# Altium PCB Bee Hive MasterBoard PCB_v2.PcbDoc
Units mm, origin at the board's own origin, x right, y up, seen from the top; angles counter-clockwise.
Board outline 90 x 88 mm, 2 copper layers (Top Layer, Bottom Layer), stack 1.671 mm thick; 33 components, 32 nets, 145 pads, 48 vias.
Unrouted connection lines stored in the file: 173.
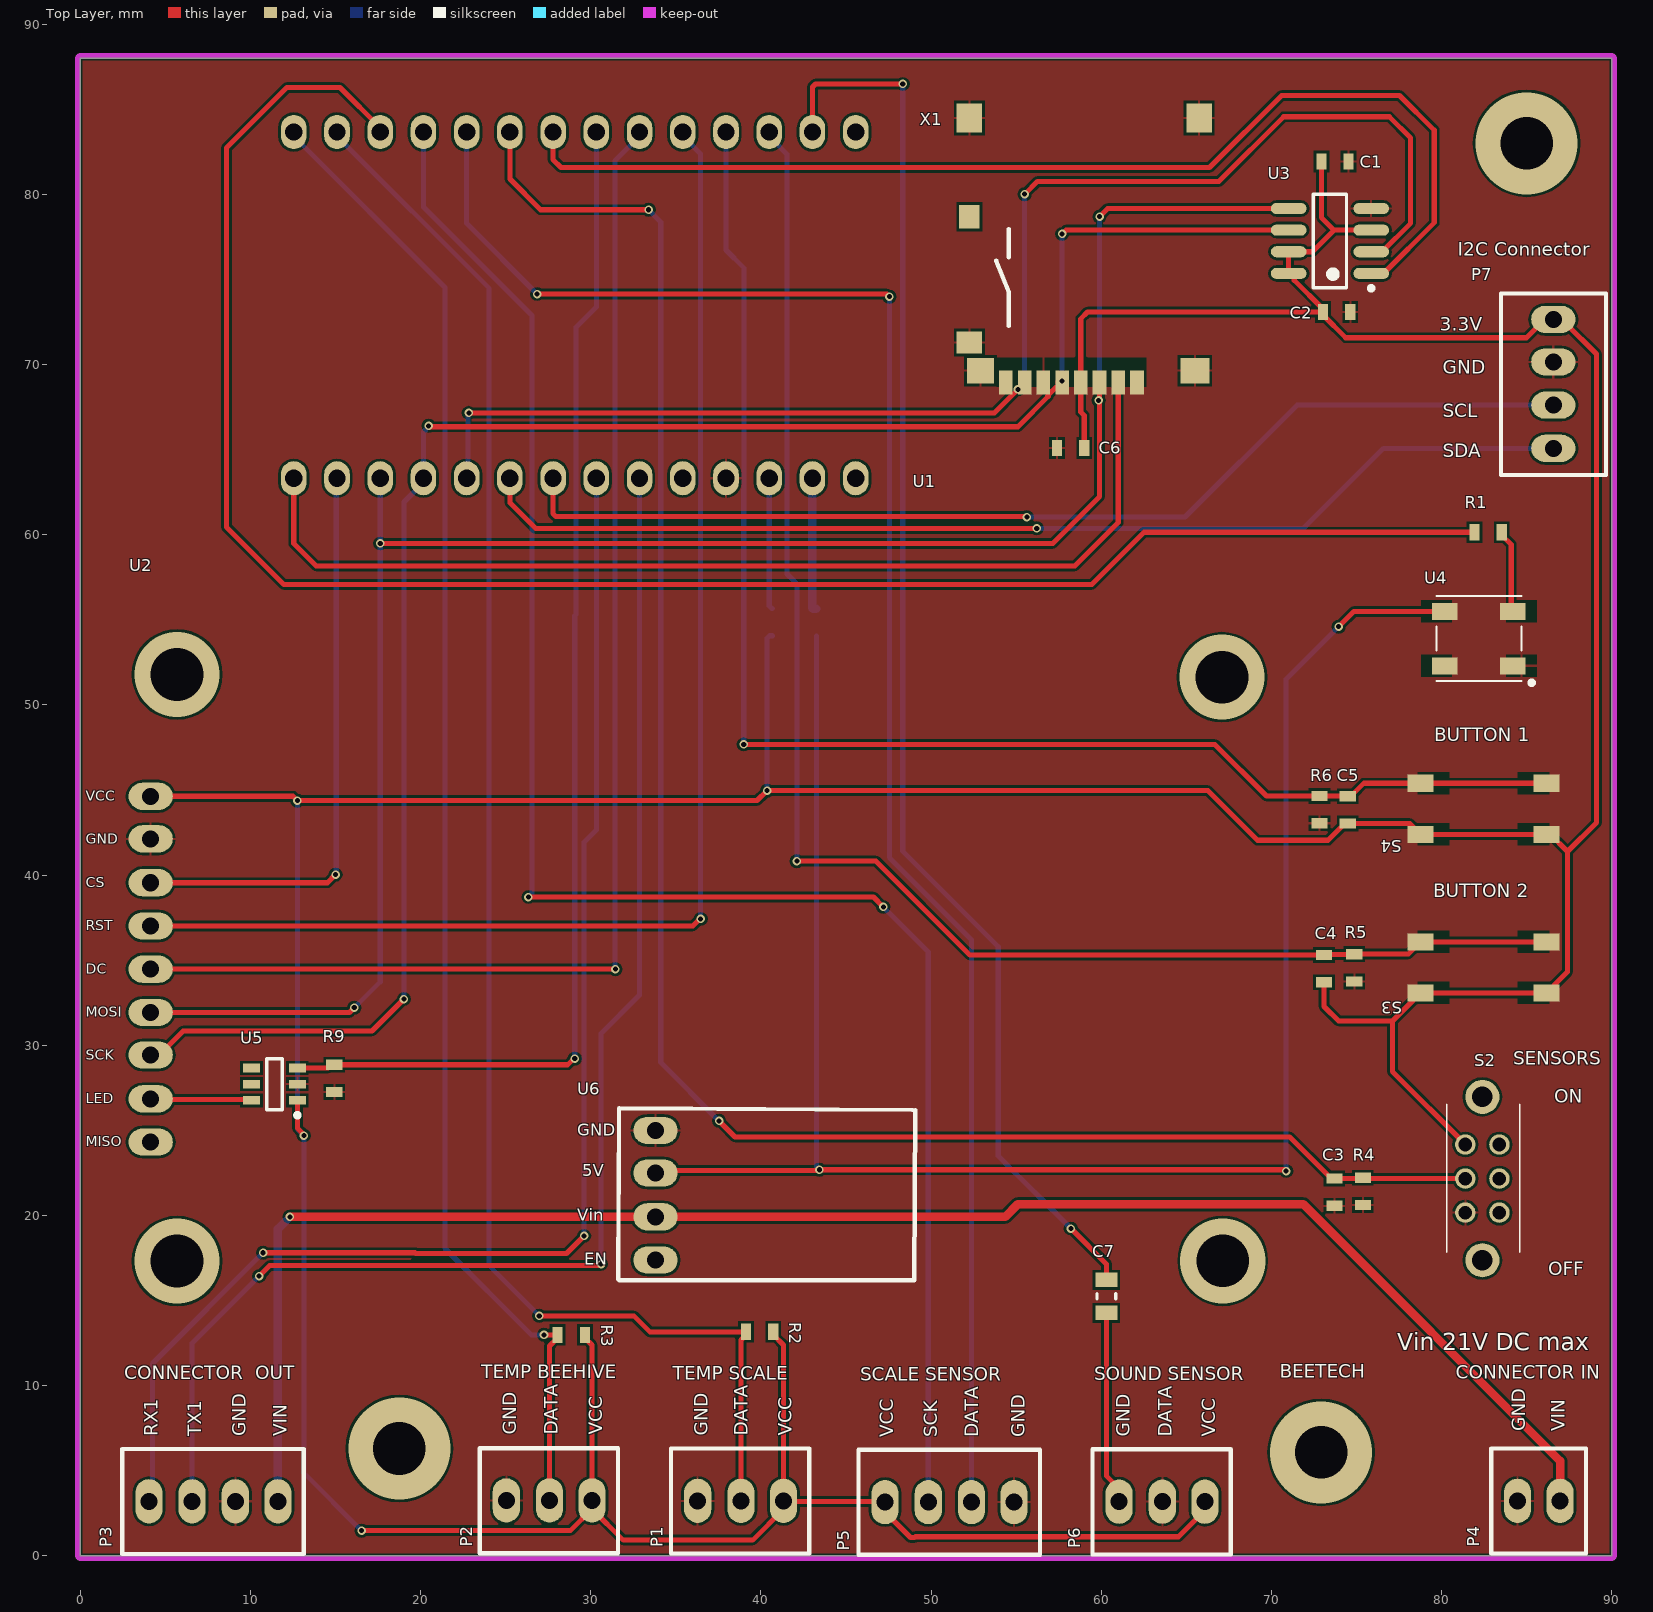
[diagram p0: Top Layer view]
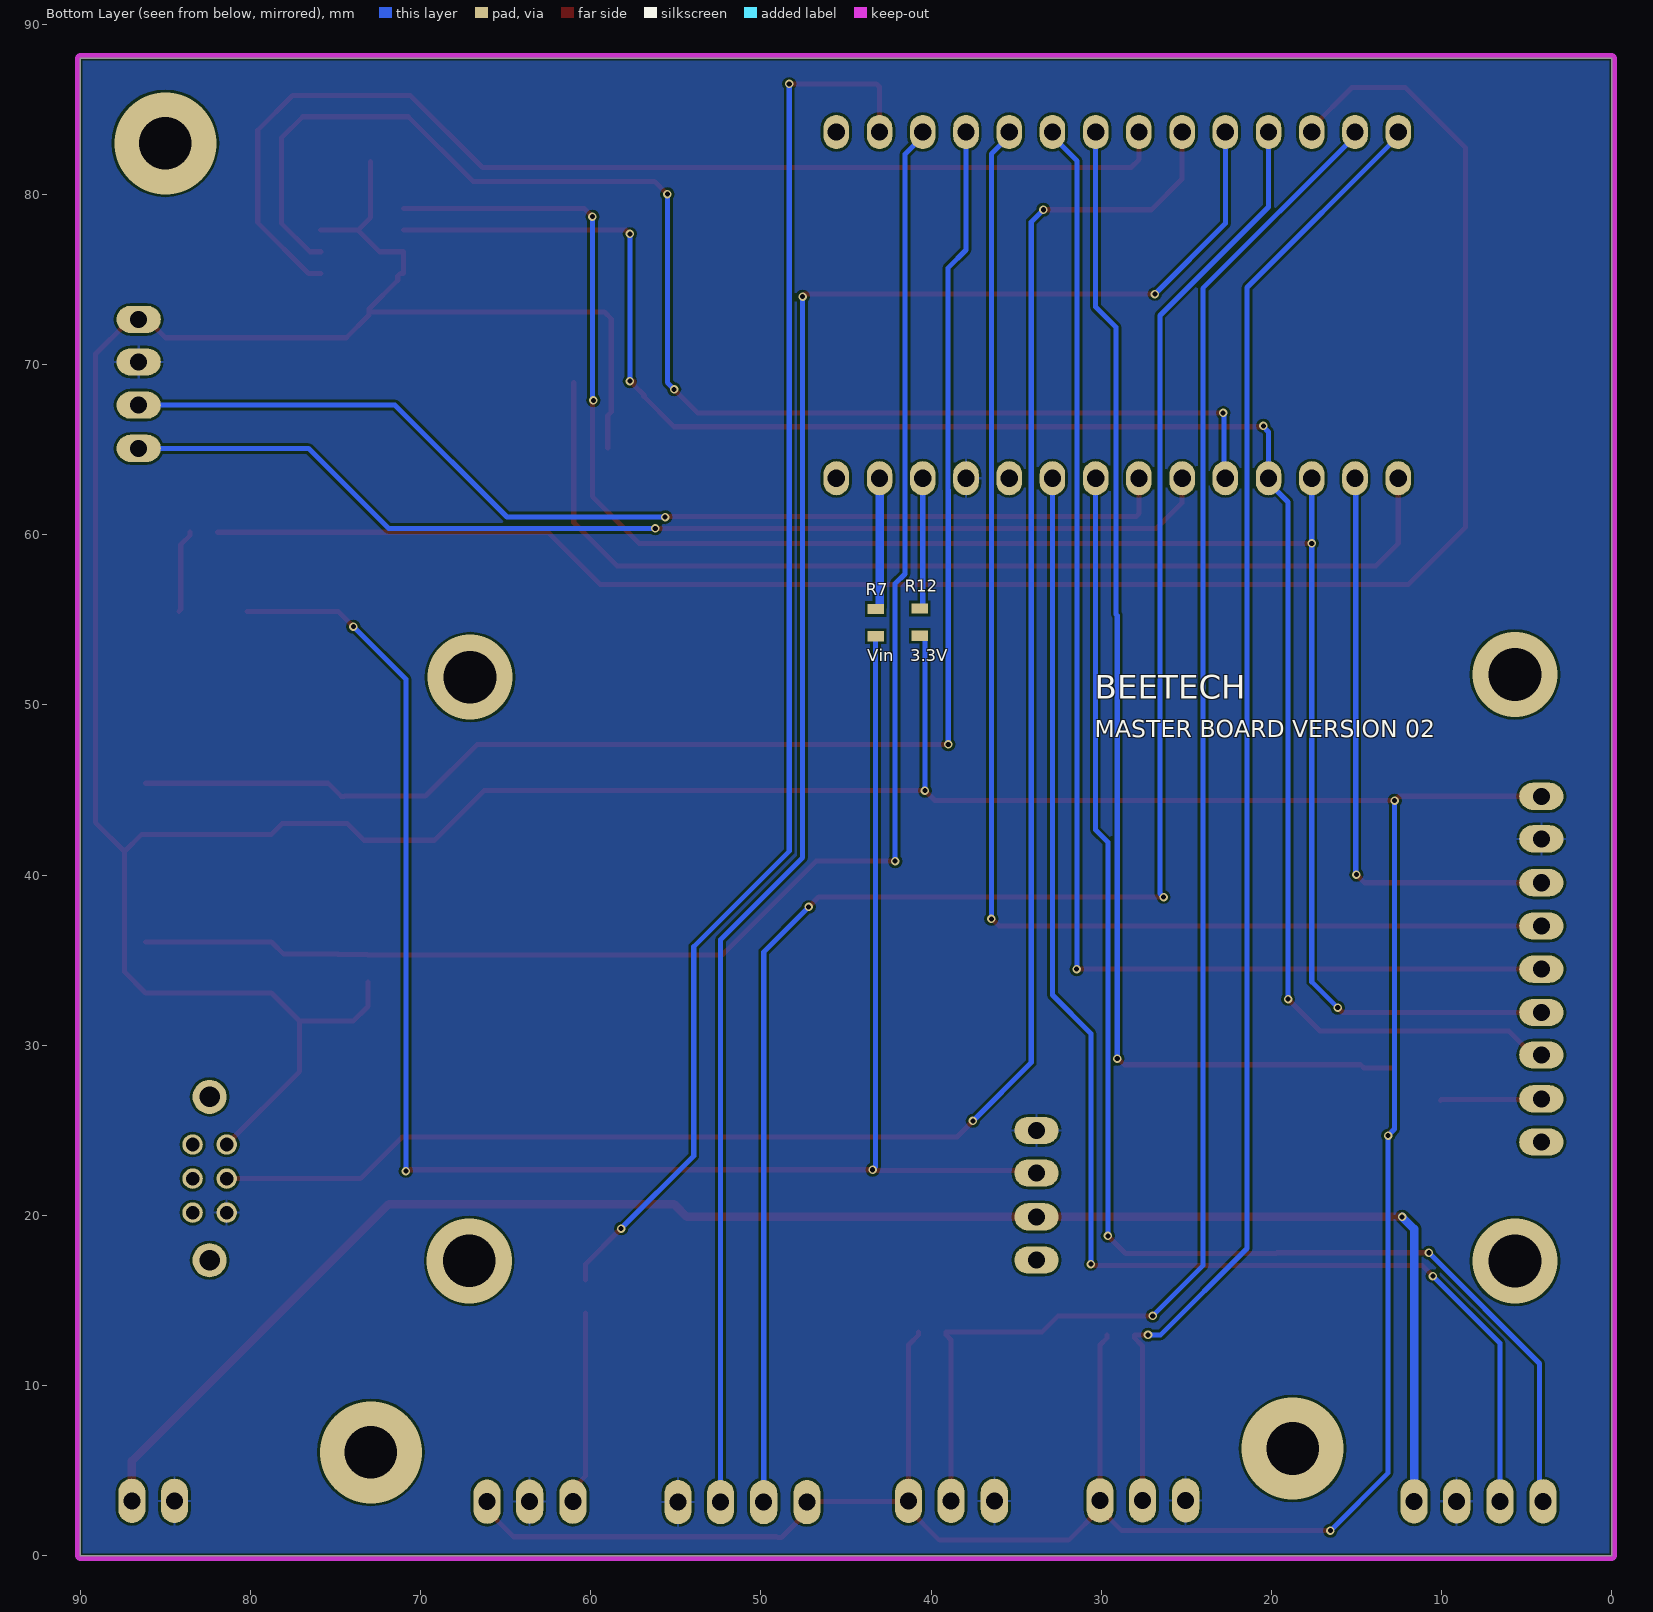
[diagram p1: Bottom Layer view, seen from below]

## Layer stack, top to bottom
Top Solder: solder mask 0.0102, Solder Resist, Dk 3.5
Top Layer: signal copper 0.0356
Dielectric1: core 1.6, FR-4, Dk 4.8
Bottom Layer: signal copper 0.0356
Bottom Solder: solder mask 0.0102, Solder Resist, Dk 3.5

## Board outline
0,0 90,0 90,88 0,88

## Design rules (kind name [scope] priority, off if disabled: settings)
Clearance Clearance_1 [InNamedPolygon('SW_L01_P024')] p1: gap=0.254 ignorepadtopadclearanceinfootprint=FALSE except(0: Arc-Hole Track-Hole SMDPad-Hole THPad-Hole Via-Hole Fill-Hole Poly-Hole Region-Hole Text-Hole)
Clearance [All] p2: gap=0.15 ignorepadtopadclearanceinfootprint=FALSE
ComponentClearance [All] p1: gap=0.001 collisioncheckmode=3 verticalgap=0.254 showdistances=FALSE
FabricationTestPointUsage [All] p1 off: valid=0 allowmultiple=FALSE
FabricationTestpoint [All] p1 off: side=3 testpointundercomponent=TRUE minsize=1.016 maxsize=2.54 preferedsize=1.524 minholesize=0 maxholesize=1.016 preferedholesize=0.813 testpointgrid=0.025 allowsidetop=TRUE allowsidebottom=TRUE usegrid=TRUE gridtolerance=0
HoleSize [All] p1: absolutevalues=TRUE maxlimit=6 minlimit=0.025 maxpercent=80.000 minpercent=20.000
HoleToHoleClearance [All] p1: gap=0 allowstackedmicrovias=TRUE
MinimumSolderMaskSliver [All] p1: minsoldermaskwidth=0
PolygonConnect PolygonConnect_14 [All vs IsNamedPolygon('GND_L01_P041')] p1: connectstyle=Relief reliefconductorwidth=0.15 reliefentries=4 polygonreliefangle="90 Angle" airgapwidth=0.15
PolygonConnect V_BAT_L01_P036 [All vs IsNamedPolygon('V_BAT_L01_P036')] p2: connectstyle=Direct reliefconductorwidth=0.254 reliefentries=4 polygonreliefangle="90 Angle" airgapwidth=0.254
PolygonConnect V_BAT2 [All vs IsNamedPolygon('V_BAT2_L01_P004')] p3: connectstyle=Direct reliefconductorwidth=0.254 reliefentries=4 polygonreliefangle="90 Angle" airgapwidth=0.254
PolygonConnect V_BAT [All vs IsNamedPolygon('V_BAT_L01_P010')] p4: connectstyle=Direct reliefconductorwidth=0.254 reliefentries=4 polygonreliefangle="90 Angle" airgapwidth=0.254
PolygonConnect V_SYS2 [All vs IsNamedPolygon('V_SYS2_L01_P012')] p5: connectstyle=Direct reliefconductorwidth=0.254 reliefentries=4 polygonreliefangle="90 Angle" airgapwidth=0.254
PolygonConnect +3.3b_uBlox [All vs IsNamedPolygon('+3.3V_UBLOX_L01_P014')] p6: connectstyle=Direct reliefconductorwidth=0.254 reliefentries=4 polygonreliefangle="90 Angle" airgapwidth=0.254
PolygonConnect V_LIPO_SYS_L01_P016 [All vs IsNamedPolygon('V_LIPO_SYS_L01_P016')] p7: connectstyle=Direct reliefconductorwidth=0.254 reliefentries=4 polygonreliefangle="90 Angle" airgapwidth=0.254
PolygonConnect V_LIPO_SYS_L01_P020 [All vs IsNamedPolygon('V_LIPO_SYS_L02_P020')] p8: connectstyle=Direct reliefconductorwidth=0.254 reliefentries=4 polygonreliefangle="90 Angle" airgapwidth=0.254
PolygonConnect V_SYS_L02_P024 [All vs IsNamedPolygon('V_SYS_L02_P024')] p9: connectstyle=Direct reliefconductorwidth=0.254 reliefentries=4 polygonreliefangle="90 Angle" airgapwidth=0.254
PolygonConnect VCC_USB_5.0V_L01_P026 [All vs IsNamedPolygon('VCC_USB_5.0V_L01_P026')] p10: connectstyle=Direct reliefconductorwidth=0.254 reliefentries=4 polygonreliefangle="90 Angle" airgapwidth=0.254
PolygonConnect SW [All vs IsNamedPolygon('SW_L01_P008')] p11: connectstyle=Direct reliefconductorwidth=0.254 reliefentries=4 polygonreliefangle="90 Angle" airgapwidth=0.254
PolygonConnect [All] p12: connectstyle=Relief reliefconductorwidth=0.15 reliefentries=4 polygonreliefangle="90 Angle" airgapwidth=0.15
RoutingVias [All] p1: holewidth=0.3 width=0.5 viastyle="Through Hole" minholewidth=0.2 minwidth=0.3 maxholewidth=1.2 maxwidth=2 useviatemplates=TRUE viatemplateguid#1={68F519FB-439D-452A-8ACF-2DE296BA9197} viatemplateguid#2={5ED9683F-E5DF-4E78-BDB1-49E541A8EC46} viatemplateguid#3={FAFF2F81-81C9-46E2-9D3D-D8AEF9417303} viatemplateguid#4={175E6F9D-763D-42D4-A59E-C21ACC7DA2E1} viatemplatename#1=v50h30m0mx0 viatemplatename#2=v50h30m50mx0 viatemplatename#3=v50h20 viatemplatename#4=v50h20mx0
SilkToSilkClearance [All] p1: silktosilkclearance=0.152
SilkToSolderMaskClearance [IsPad] p1: minsilkscreentomaskgap=0.127 clearancetoexposedcopper=TRUE
SolderMaskExpansion [All] p1: expansion=0.102 istentingtop=FALSE
Width [All] p1: maxlimit=5.08 minlimit=0.01 preferedwidth=0.305 minimp=50.000000 maximp=50.000000 favimp=50.000000
22 further rules are at their usual default settings.

## Components (designator, comment, footprint, x,y, rotation, side; value= is the part's Value field where it differs from the comment)
C1 "100nF 0603_1" "CAP 0603" 73.735,81.926 r180 top value=100nF
C2 "100nF 0603_1" "CAP 0603" 73.836,73.087 r180 top value=100nF
C3 "100nF 0603" "CAP 0603" 73.698,21.363 r270 top value=100nF
C4 "100nF 0603" "CAP 0603" 73.094,34.502 r90 top value=100nF
C5 "100nF 0603" "CAP 0603" 74.489,43.827 r90 top value=100nF
C6 "10uF 0603" "CAP 0603" 58.202,65.1 r0 top value=10uF
C7 "100nF 0805" "CAP 0805" 60.3,15.24 r90 top value=1uF
P1 "3-Pin Right Angle Housing" "3PIN - RND 205-EK254-2.54-03P" 41.325,3.225 r270 top
P2 "3-Pin Right Angle Housing" "3PIN - RND 205-EK254-2.54-03P" 30.078,3.25 r270 top
P3 "4-Pin Right Angle Housing" "4PIN - RND 205-EK254-2.54-04P" 11.615,3.2 r270 top
P4 "2-Pin Right Angle Housing" "2PIN - RND 205-EK254-2.54-02P" 86.965,3.225 r270 top
P5 "4-Pin Right Angle Housing" "4PIN - RND 205-EK254-2.54-04P" 54.875,3.15 r270 top
P6 "3-Pin Right Angle Housing" "3PIN - RND 205-EK254-2.54-03P" 66.09,3.175 r270 top
P7 "4-Pin Right Angle Housing" "4PIN - RND 205-EK254-2.54-04P" 86.563,72.655 r0 top
R1 "470 Ohm 0603" "RES 0603 FOOTPRINT" 82.741,60.147 r0 top value=470
R2 "4.7k Ohm 0603" "RES 0603 FOOTPRINT" 39.929,13.157 r180 top value=4.7k
R3 "4.7k Ohm 0603" "RES 0603 FOOTPRINT" 28.854,12.979 r180 top value=4.7k
R4 "10k Ohm 0603" "RES 0603 FOOTPRINT" 75.373,21.416 r90 top value=10k
R5 "10k Ohm 0603" "RES 0603 FOOTPRINT" 74.869,34.552 r90 top value=10k
R6 "10k Ohm 0603" "RES 0603 FOOTPRINT" 72.829,43.846 r90 top value=10k
R7 "0 Ohm 0603" "RES 0603 FOOTPRINT" 43.256,54.839 r270 bottom value=0
R9 "47k Ohm 0603" "RES 0603 FOOTPRINT" 14.93,28.052 r90 top value=47k
R12 "0 Ohm 0603" "RES 0603 FOOTPRINT" 40.665,54.864 r270 bottom value=0
S2 "Schiebeschalter EG2207" "Schiebeschalter on-on 2 P, EG2207" 82.398,22.163 r90 top
S3 "Taster Print_SMD_3" "Taster Print - SMD - PTS647SM70SMTR2LFS" 82.463,34.572 r180 top
S4 "Taster Print_SMD_3" "Taster Print - SMD - PTS647SM70SMTR2LFS" 82.463,43.894 r180 top
U1 "Arduino MKR GSM 1400" "Arduino GSM MKR 1400 v2" 49.378,73.508 r180 top locked
U2 "TFT 2.2 SPI 240x320" "TFT 2.2 SPI 240x320" 4.14,44.628 r0 top locked
U3 "FRAM MB85RS64VPNF-G-JNERE1" "SO 8Pin" 73.44,77.263 r180 top
U4 "neoPixel" "neoPixel 5050 adafruit 1655" 82.194,53.899 r0 top
U5 "TPS22917DBVT" "SOT23 - 6" 11.412,27.711 r180 top
U6 "MPM3610 5V" "MPM3610 Buck Converter" 33.807,24.994 r0 top
X1 "SD micro Card Holder_2" "SD Card Holder - micro - 2 - sd Card inserted" 52.998,85.339 r0 top

## Footprints (in the part's own frame and the unit in brackets; to place one, negate y for a bottom-side part, rotate by r counter-clockwise, add the part's x,y. Pads: shape width x height; smd on the part's side, far side on the other; paste and mask are expansions set on the pad)
"2PIN - RND 205-EK254-2.54-02P" [mm] "RND 205-EK254-2.54-02P"
  oval 2.6x1.6 hole 1: 1(0,0) 2(0,-2.5)
  silkscreen extent -3.07,-4.04 3.1,1.52, body extent -3.1,-3.99 3.1,1.55, height 8.51
"3PIN - RND 205-EK254-2.54-03P" [mm] "RND 205-EK254-2.54-03P"
  oval 2.6x1.6 hole 1: 1(0,0) 2(0,-2.5) 3(0,-5.04)
  silkscreen extent -3.07,-6.6 3.1,1.52, body extent -3.1,-6.55 3.1,1.53, height 8.51
"4PIN - RND 205-EK254-2.54-04P" [mm] "RND 205-EK254-2.54-04P"
  oval 2.6x1.6 hole 1: 1(0,0) 2(0,-2.5) 3(0,-5.04) 4(0,-7.58)
  silkscreen extent -3.07,-9.14 3.1,1.52, body extent -3.1,-9.1 3.1,1.52, height 8.51
"Arduino GSM MKR 1400 v2" [mm] "Arduino GSM MKR 1400 v2"
  oval 1.5x2 hole 1.016: 1(3.81,-10.16) 2(6.35,-10.16) 3(8.89,-10.16) 4(11.43,-10.16) 5(13.97,-10.16) 6(16.51,-10.16) 7(19.05,-10.16) 8(21.59,-10.16) 9(24.13,-10.16) 10(26.67,-10.16) 11(29.21,-10.16) 12(31.75,-10.16) 13(34.29,-10.16) 14(36.83,-10.16) 15(36.83,10.19) 16(34.29,10.19) 16(34.29,10.19) 17(31.75,10.19) 18(29.21,10.19) 19(26.67,10.19) 20(24.13,10.19) 21(21.59,10.19) 22(19.05,10.19) 23(16.51,10.19) 24(13.97,10.19) 25(11.43,10.19) 26(8.89,10.19) 27(6.35,10.19) 28(3.81,10.19)
  body extent -22.02,-12.5 49.34,12.5, height 18.11
"CAP 0603" [mm] "CAP 0603"
  rect 0.6x0.95 smd: 1(-0.8,0) 2(0.8,0)
  body extent -0.8,-0.4 0.8,0.4, height 0.8
"CAP 0805" [mm] "CAP 0805"
  rect 0.85x1.3 smd: 1(-0.975,0) 2(0.975,0)
  silkscreen extent -0.15,-0.55 0.15,0.55, body extent -1,-0.63 1,0.63, height 0.65
"MPM3610 Buck Converter" [mm]
  oval 2.6x1.6 hole 1: 1(0,0) 2(0,-2.5) 3(0,-5.08) 4(0,-7.62)
  silkscreen extent -2.2,-8.8 15.26,1.3, body extent -2.2,-8.7 15.2,1.3, height 3.6
"neoPixel 5050 adafruit 1655" [mm] "neoPixel 5050 adafruit 1655"
  rect 1.5x1 smd: 1(2,-1.6) 2(2,1.6) 3(-2,1.6) 4(-2,-1.6)
  silkscreen extent -2.5,-2.72 3.22,2.5, body extent -2.5,-2.5 2.5,2.5, height 2
"RES 0603 FOOTPRINT" [mm] "RES 0603 FOOTPRINT"
  rect 0.6x0.95 smd: 1(-0.8,0) 2(0.8,0)
  body extent -0.8,-0.4 0.8,0.4, height 0.8
"Schiebeschalter on-on 2 P, EG2207" [mm] "Schiebeschalter on-on 2 P, EG2207"
  round 1.2 hole 0.8: 1(-2,1) 2(0,1) 3(2,1) 4(-2,-1) 5(0,-1) 6(2,-1)
  round 2 hole 1.2: 10(-4.8,0) 10(4.8,0)
  silkscreen extent -4.33,-2.2 4.37,2.1, body extent -4.98,-3.05 5.02,2.95, height 7.7
"SD Card Holder - micro - 2 - sd Card inserted" [mm] "micro SD Card holder, Molex Part Number:   502774-0891"
  rect 0.8x1.4 smd: 1(9.1,-16.4) 2(8,-16.4) 3(6.9,-16.4) 4(5.8,-16.4) 5(4.7,-16.4) 6(3.6,-16.4) 7(2.5,-16.4) 8(1.4,-16.4)
  rect 1.2x1.4 smd: 10(-0.75,-6.65)
  rect 1.5x1.3 smd: 20(-0.75,-14.05)
  rect 1.5x1.7 smd: 20(-0.75,-0.85) 20(12.75,-0.85)
  rect 1.6x1.5 smd: 20(-0.1,-15.7)
  rect 1.7x1.5 smd: 20(12.5,-15.7)
  silkscreen extent 0.82,-13.08 1.57,-7.37, body extent -1,-16.1 13.3,2.2, height 1.81
"SO 8Pin" [mm] "SOIC, 8-Leads, Body 5,50x3,90mm, Pitch 1,27mm, IPC Medium Density"
  oval 2.1x0.65 smd: 1(-2.425,1.905) 2(-2.425,0.635) 3(-2.425,-0.635) 4(-2.425,-1.905) 5(2.425,-1.905) 6(2.425,-0.635) 7(2.425,0.635) 8(2.425,1.905)
  silkscreen extent -2.55,-2.75 0.98,2.9, body extent -1.95,-2.75 1.95,2.75, height 1.55
"SOT23 - 6" [mm] "SOT23, 6-Leads, Body 2,90x2,80mm, Pitch 0,95mm, IPC Medium Density"
  rect 1x0.5 smd: 1(-1.35,0.95) 2(-1.35,0) 3(-1.35,-0.95) 4(1.35,-0.95) 5(1.35,0) 6(1.35,0.95)
  silkscreen extent -1.48,-1.5 0.45,1.95, body extent -0.85,-1.5 0.85,1.5, height 1.1
"Taster Print - SMD - PTS647SM70SMTR2LFS" [mm] "https://www.mouser.ch/ProductDetail/CK/PTS647SM70SMTR2LFS?qs=PqoDHHvF64%252Bxl5nIb9IaOw%3D%3D"
  rect 1.55x1 smd: 1(3.7,1.5) 2(-3.7,1.5) 3(3.7,-1.5) 4(-3.7,-1.5)
  body extent -3.28,-2.22 3.22,2.28, height 7.2
"TFT 2.2 SPI 240x320" [mm]
  oval 2.6x1.6 hole 1: 1(0,0) 2(0,-2.5) 3(0,-5.08) 4(0,-7.62) 5(0,-10.16) 6(0,-12.7) 7(0,-15.2) 8(0,-17.78) 9(0,-20.32)
  body extent -1.52,-30.16 65.98,9.84, height 14.41

## Part data
C1 C2 C3 C4 C5 C6 C7: "C CERAMIC SMD", Bezeichnung="C SMD"
  C1 C2: Haendler=Mouser, Haendler Nr=603-CC0603JPX79BB104, Hersteller=Yageo, Hersteller Nr=CC0603JPX7R9BB104, housing/footprint=0603, Preis (CHF)=0.15, Umax=50V
  C3 C4 C5: Haendler=Mouser, Haendler Nr=710-885012206020, Hersteller=Würth, Hersteller Nr=885012206020, housing/footprint=0603, Preis (CHF)=0.05, Umax=10V
  C6: Dielektrikum=X5R, Haendler=Mouser, Haendler Nr=810-C1608X5R1A106K, Hersteller=TDK, Hersteller Nr=C1608X5R1A106K080AC, housing/footprint=0603, Preis (CHF)=0.5, Umax=10V
  C7: Haendler=Farnell, Haendler Nr=2496946, housing/footprint=0805, Preis (CHF)=0.0126
P1 P2 P6: library part "3-Pin Screw Terminal", "3-Pin", ComponentLink1Description=Mouser, ComponentLink1URL=https://www.mouser.ch/ProductDetail/TE-Connectivity/640453-2?qs=sGAEpiMZZMs%252bGHln7q6pm5E1Eb6qwPl2KIU5TYv3tVY%3d, Haendler=Distrelec, Haendler Nr=301-27-919, Preis (CHF)=0.60
P3 P5 P7: library part "4-Pin Screw Terminal", "4-Pin", ComponentLink1Description=Mouser, ComponentLink1URL=https://www.mouser.ch/ProductDetail/TE-Connectivity/640453-2?qs=sGAEpiMZZMs%252bGHln7q6pm5E1Eb6qwPl2KIU5TYv3tVY%3d, Haendler=Distrelec, Haendler Nr=301-27-920, Hersteller=RND, Hersteller Nr="RND 205-EK254-2.54-04P", Preis (CHF)=0.60
P4: library part "2-Pin Screw Terminal", "2-Pin", ComponentLink1Description=Mouser, ComponentLink1URL=https://www.mouser.ch/ProductDetail/TE-Connectivity/640453-2?qs=sGAEpiMZZMs%252bGHln7q6pm5E1Eb6qwPl2KIU5TYv3tVY%3d, Haendler=Distrelec, Haendler Nr=301-27-918, Preis (CHF)=0.60
R1 R2 R3 R4 R5 R6 R7 R9 R12: "R SMD", Bezeichnung="R SMD", Haendler=Mouser, housing/footprint=0603
  R1: Haendler Nr=594-MCT06030C4700FP5, Preis (CHF)=0.15
  R2 R3: Haendler Nr=755-ESR03EZPF4701, Preis (CHF)=0.01
  R4 R5 R6: Haendler Nr=603-AC0603FR-0710KL, Hersteller=Yageo, Hersteller Nr=AC0603FR-0710KL, Preis (CHF)=0.01
  R7 R12: Haendler Nr=667-ERJ-3GEY0R00V, Hersteller=ERJ-3GEY0R00V, Hersteller Nr=Panasonic, Preis (CHF)=0.01
  R9: Haendler Nr=603-AC0603FR-0747KL, Hersteller=Yageo, Hersteller Nr=AC0603FR-0747KL, Preis (CHF)=0.01
S2: "Schiebeschalter on-on PCM12SMTR", ComponentLink1Description=C&K, ComponentLink1URL=https://www.ckswitches.com/products/switches/product-details/Slide/AYZ/AYZ0202AGRLC/, Haendler=Mouser, Haendler Nr=612-EG2207, Hersteller="E SWITCH", Hersteller Nr=EG2207, Preis (CHF)=0.66
S3 S4: library part "Taster Print_SMD_6", "Taster", ComponentLink1Description=link, ComponentLink1URL=https://www.digikey.ch/product-detail/de/wurth-electronics-inc/430473035826/732-7021-1-ND/5225469, Haendler=Mouser, Haendler Nr=611-PTS647SM70SMTR2L, link=https://www.mouser.ch/ProductDetail/CK/PTS647SM70SMTR2LFS?qs=PqoDHHvF64%252Bxl5nIb9IaOw%3D%3D, Preis (CHF)=0.38
U1: "https://store.arduino.cc/arduino-mkr-gsm-1400-1415", ComponentLink3URL=http://ch.farnell.com/stmicroelectronics/stm32l496vgt6/mcu-arm-cortex-m4-80mhz-lqfp-100/dp/2725139?st=STM32L496VGT6, link=https://store.arduino.cc/arduino-mkr-gsm-1400-1415, Preis (CHF)=75
U2: "https://www.banggood.com/1_441_82_02_22_4-Inch-TFT-LCD-Display-Module-Colorful-Screen-Module-SPI-Interface-p-1494883.html?rmmds=search&ID=6211522&cur_warehouse=CN", ComponentLink3URL=http://ch.farnell.com/stmicroelectronics/stm32l496vgt6/mcu-arm-cortex-m4-80mhz-lqfp-100/dp/2725139?st=STM32L496VGT6, Haendler="Banggood / Aliexpress", link=https://www.banggood.com/1_441_82_02_22_4-Inch-TFT-LCD-Display-Module-Colorful-Screen-Module-SPI-Interface-p-1494883.html?rmmds=search&ID=6211522&cur_warehouse=CN, Link 2=https://de.aliexpress.com/item/4000839144387.html?spm=a2g0o.productlist.0.0.48ed5371jjv3wJ&algo_pvid=f087815a-197e-468a-8055-d99fc6734484&algo_expid=f087815a-197e-468a-8055-d99fc6734484-8&btsid=0ab50f6115912653966648062e4a8e&ws_ab_test=searchweb0_0,searchweb201602_,searchweb201603_, Preis (CHF)=6
U4: library part "neoPixel 5050 adafruit 1655", "neoPixel 5050 adafruit 1655", ComponentLink1Description=Mouser, ComponentLink1URL=https://www.mouser.ch/ProductDetail/TE-Connectivity/640453-2?qs=sGAEpiMZZMs%252bGHln7q6pm5E1Eb6qwPl2KIU5TYv3tVY%3d, Haendler=Mouser, Haendler Nr=485-1655, Hersteller=Adafruit, Hersteller Nr=1655, Preis (CHF)=0.60
U5: "High Side Switch", Code_JEDEC="SOT 23-6", Haendler=Mouser, Haendler Nr=595-TPS22917DBVT, Hersteller=TI, Hersteller Nr=TPS22917DBVT, link=https://www.mouser.ch/ProductDetail/Texas-Instruments/TPS22917DBVT?qs=sGAEpiMZZMve4%2fbfQkoj%252bPJ2V24ZqG0%252bKgHGtqls2rU%3d, Preis (CHF)=0.6
U6: library part "MPM3610 5V Buck Converter Breakout", "MPM3610 5V Buck Converter Breakout - 21V In 5V Out at 1.2A", Haendler=Mouser, Haendler Nr=485-4739, Hersteller=Adafruit, Hersteller Typ=4739, link=https://www.adafruit.com/product/4739, Preis (CHF)=5.95
X1: "SD micro Card  Holder", Haendler=Mouser, Haendler2=Farnell, Haendler2 Nr=2064063, Haendler Nr=538-502774-0891, Hersteller=Molex, Hersteller Nr=502774-0891, Preis (CHF)=3.15
U3: ComponentLink1Description="Product search", ComponentLink1URL=https://www.digikey.com/products/en?t=774&v=865&pv149=380462&pv961=349252&pv570=349254&pv142=158003, Haendler=digikey, Haendler Nr=865-1260-1-ND, Hersteller=FUJITSU, Hersteller Nr.=MB85RS64VPNF-G-JNERE1, Preis (CHF)=1.8

## Via types
v1: diameter 0.5, hole 0.3, Top Layer to Bottom Layer, tented both sides, 41 vias
v2: diameter 5, hole 3.1, Top Layer to Bottom Layer, tented both sides, 4 vias
v3: diameter 6, hole 3.1, Top Layer to Bottom Layer, 3 vias

## Nets (pads, with @x,y where several pads share a name; then routed paths per layer and width w, separated by ;. In a path a pad name is that pad's centre, name@x,y a point inside that pad or via, vN(x,y) a via of type N, cw(c..) or ccw(c..) an arc to the next point about the centre after c; other vN are vias at no path point)
BUTTON_1: C4.2 R5.2 S3.3 S3.4 U1.3 | length 90.2
  Top Layer w0.3: v1(42.113,40.818) 46.761,40.818 52.277,35.302 C4.2 73.119,35.327 74.844,35.327 R5.2 78.043,35.352 S3.3 S3.4
  Bottom Layer w0.3: U1.3 40.488,83.418 41.54,82.365 41.54,57.698 42.113,57.125 v1(42.113,40.818)
BUTTON_2: C5.2 R6.2 S4.3 S4.4 U1.4 | length 85.2
  Top Layer w0.3: v1(38.989,47.676) 66.675,47.676 69.705,44.646 R6.2 72.838,44.636 74.479,44.636 C5.2 74.664,44.627 75.431,45.394 S4.3 S4.4
  Bottom Layer w0.3: U1.4 37.948,76.733 38.998,75.683 38.998,62.633 38.989,62.624 v1(38.989,47.676)
"CS FRAM": U1.8 U3.1 | length 66.6
  Top Layer w0.3: U1.8 27.788,82.042 28.254,81.576 66.361,81.576 70.601,85.815 77.529,85.815 79.57,83.774 79.57,78.338 76.59,75.358 U3.1
"CS SD CARD": U1.15 X1.2 | length 62.1
  Top Layer w0.3: U1.15 12.548,59.487 13.868,58.166 58.445,58.166 60.998,60.718 X1.2
"CS TFT": U1.16 U2.3 | length 34.4
  Top Layer w0.3: U2.3 14.525,39.548 v1(15.005,40.027)
  Bottom Layer w0.3: v1(15.005,40.027) 15.043,40.065 15.043,63.273 U1.16@15.088,63.318
DATA_TEMP_1: P1.2 R2.2 U1.13 | length 97.1
  Top Layer w0.3: v1(26.975,14.097) 32.534,14.097 33.474,13.157 R2.2 39.129,12.982 38.825,12.678 P1.2
  Bottom Layer w0.3: U1.13 15.088,83.418 24.028,74.477 24.028,17.043 v1(26.975,14.097)
DATA_TEMP_2: P2.2 R3.2 U1.14 | length 87.9
  Top Layer w0.3: v1(27.253,12.979) R3.2 28.054,12.804 27.578,12.328 P2.2
  Bottom Layer w0.3: U1.14 12.548,83.418 21.438,74.528 21.438,18.049 26.507,12.979 v1(27.253,12.979)
"DC TFT": U1.6 U2.5 | length 77.1
  Top Layer w0.3: U2.5 v1(31.445,34.468)
  Bottom Layer w0.3: v1(31.445,34.468) 31.42,34.493 31.42,81.97 32.868,83.418 U1.6
DT_HX711: P5.2 U1.10 | length 104.8
  Top Layer w0.3: v1(26.848,74.143) 47.396,74.143 v1(47.549,73.99)
  Bottom Layer w0.3: U1.10 22.708,78.283 v1(26.848,74.143) ; v1(47.549,73.99) 47.549,41.021 52.375,36.195 P5.2
GND: C1.1 C2.1 C3.2 C6.1 P1.3 P2.3 P3.2 P4.2 P5.1 P6.2 P7.2 R4.1 R5.1 R6.1 R9.1 S2.1 U1.25 U2.2 U3.4 U4.1 U5.2 U6.1 X1.6 X1.20
"LED TFT": U2.8 U5.6 | length 6
  Top Layer w0.3: U2.8 4.183,26.805 10.019,26.805 U5.6
MISO: U1.19 U3.2 X1.7 | length 82
  Top Layer w0.3: v1(22.835,67.158) 53.716,67.158 v1(55.103,68.545) X1.7 ; v1(55.498,80.013) 56.251,80.766 66.923,80.766 70.721,84.564 76.924,84.564 78.181,83.307 78.181,78.311 76.499,76.628 U3.2
  Bottom Layer w0.3: U1.19 22.796,63.406 22.796,67.119 v1(22.835,67.158) ; v1(55.103,68.545) 55.498,68.939 v1(55.498,80.013)
MOSI: U1.17 U2.6 U3.5 X1.3 | length 116.1
  Top Layer w0.3: U2.6 15.824,31.928 v1(16.104,32.207) ; v1(17.628,59.487) 57.15,59.487 59.898,62.235 X1.3 ; v1(59.898,78.689) 60.377,79.168 U3.5
  Bottom Layer w0.3: v1(16.104,32.207) 17.628,33.731 v1(17.628,59.487) U1.17 ; v1(59.842,67.894) 59.898,67.95 v1(59.898,78.689)
NC: U6.4
NEO_PIX_DATA: R1.1 U1.12 | length 110
  Top Layer w0.3: U1.12 17.628,83.918 15.261,86.284 12.141,86.284 8.585,82.728 8.585,60.452 11.963,57.074 59.441,57.074 62.515,60.147 R1.1
NetC7_1: C7.1 P6.3 | length 11.4
  Top Layer w0.3: C7.1 60.3,4.692 61.05,3.942 P6.3
NetR1_2: R1.2 U4.2 | length 4.9
  Top Layer w0.3: R1.2 83.541,59.972 84.094,59.418 84.094,55.599 U4.2
NetR12_1: R12.1 U1.26 | length 7.7
  Bottom Layer w0.3: U1.26 40.488,55.814 40.638,55.664 R12.1
"RST TFT": U1.5 U2.4 | length 79.2
  Top Layer w0.3: U2.4 35.994,37.008 36.403,37.418 v1(36.458,37.418)
  Bottom Layer w0.3: U1.5 35.408,83.418 36.458,82.368 v1(36.458,37.418)
"RX 1": P3.4 U1.22 | length 81.5
  Top Layer w0.3: v1(10.744,17.805) 19.66,17.805 19.71,17.755 28.572,17.755 v1(29.607,18.79)
  Bottom Layer w0.3: P3.4 4.242,3.407 4.242,11.303 v1(10.744,17.805) ; v1(29.607,18.79) 29.607,41.933 30.328,42.653 U1.22
SCK: U1.18 U2.7 U3.6 X1.5 | length 111.1
  Top Layer w0.3: U2.7 4.64,29.428 6.048,30.836 17.145,30.836 v1(19.025,32.715) ; v1(20.472,66.396) 20.523,66.345 55.103,66.345 56.889,68.13 ; 56.845,68.174 57.448,68.776 57.448,68.989 57.485,69.026 v1(57.698,69.026) ; v1(57.698,77.673) 57.923,77.898 U3.6
  Bottom Layer w0.3: v1(19.025,32.715) 19.025,61.925 20.168,63.068 U1.18 20.168,66.037 20.472,66.341 v1(20.472,66.396) ; v1(57.698,69.026) v1(57.698,77.673)
SCK_HX711: P5.3 U1.11 | length 104.8
  Top Layer w0.3: v1(26.34,38.71) 46.609,38.71 v1(47.193,38.125)
  Bottom Layer w0.3: U1.11 20.168,79.265 26.543,72.89 26.543,38.913 v1(26.34,38.71) ; v1(47.193,38.125) 49.835,35.484 P5.3
SCL: P7.3 U1.21 | length 63.7
  Top Layer w0.3: U1.21 27.788,61.237 27.963,61.062 55.601,61.062 v1(55.626,61.036)
  Bottom Layer w0.3: v1(55.626,61.036) 64.922,61.036 71.501,67.615 P7.3
SDA: P7.4 U1.20 | length 65.3
  Top Layer w0.3: U1.20 25.248,61.874 26.746,60.376 v1(56.21,60.376)
  Bottom Layer w0.3: v1(56.21,60.376) 71.891,60.376 76.59,65.075 P7.4
SOUND_DATA: C7.2 U1.2 | length 83.3
  Top Layer w0.3: U1.2 43.028,86.311 43.203,86.487 v1(48.336,86.487) ; v1(58.217,19.228) 60.3,17.145 C7.2
  Bottom Layer w0.3: v1(48.336,86.487) 48.336,41.402 53.95,35.789 53.95,23.495 v1(58.217,19.228)
SWITCH: C3.1 R4.2 S2.2 U1.9 | length 112.2
  Top Layer w0.3: U1.9 25.248,80.899 27.051,79.096 v1(33.401,79.096) ; v1(37.541,25.552) 38.481,24.613 71.073,24.613 73.523,22.163 C3.1 S2.2
  Bottom Layer w0.3: v1(33.401,79.096) 34.112,78.384 34.112,28.981 v1(37.541,25.552)
"TFT LED ENABLE": R9.2 U1.7 U5.3 | length 71.5
  Top Layer w0.3: U5.3 14.564,28.661 14.755,28.852 R9.2 28.644,28.852 29.003,29.211 v1(29.057,29.211)
  Bottom Layer w0.3: v1(29.057,29.211) 29.057,55.245 29.134,55.321 29.134,72.194 30.328,73.388 U1.7
"TX 1": P3.3 U1.23 | length 82.4
  Top Layer w0.3: v1(10.516,16.434) 11.125,17.043 30.451,17.043 30.55,17.143 v1(30.605,17.143)
  Bottom Layer w0.3: P3.3 6.575,12.493 v1(10.516,16.434) ; v1(30.605,17.143) 30.605,30.681 32.868,32.944 U1.23
"V IN": P3.1 P4.1 U6.3 | length 100.5
  Top Layer w0.5: v1(12.319,19.914) U6.3 54.356,19.914 55.093,20.65 71.884,20.65 86.965,5.569 P4.1
  Bottom Layer w0.5: P3.1 11.615,19.21 v1(12.319,19.914)
"V IN uC": R7.1 U1.27 | length 7.9
  Bottom Layer w0.5: U1.27 43.028,55.692 43.081,55.639 R7.1
"VCC 3.3V": C1.2 C2.2 C4.1 C5.1 C6.2 P1.1 P2.1 P5.4 P6.1 P7.1 R2.1 R3.1 R12.2 S2.3 S3.1 S3.2 S4.1 S4.2 U2.1 U3.3 U3.7 U3.8 U5.1 X1.4 | length 334.8
  Top Layer w0.3: U2.1 12.508,44.628 v1(12.762,44.374) 39.776,44.374 v1(40.361,44.958) 66.269,44.958 69.182,42.044 73.331,42.044 74.314,43.027 C5.1 78.131,43.027 S4.1 S4.2 86.384,42.394 87.401,41.377 ; U5.1 12.762,25.125 13.139,24.748 v1(13.139,24.694) ; v1(16.535,1.473) 28.801,1.473 P2.1@30.078,2.75 ; R3.1 29.654,12.804 30.078,12.381 P2.1 P2.1@30.078,2.75 ; R2.1 40.729,12.982 41.325,12.386 P1.1 ; C6.2 59.002,67.005 58.798,67.209 X1.4 58.798,72.686 59.198,73.087 C2.2 ; P6.1 66.09,2.675 64.533,1.118 49.075,1.118 49.032,1.074 48.783,1.074 47.295,2.562 P5.4 47.257,3.187 41.362,3.187 P1.1 ; C1.2 72.935,78.645 73.681,77.898 ; C4.1 73.094,32.28 73.951,31.423 77.114,31.423 ; U3.3 73.681,77.898 ; S2.3 81.398,24.19 81.371,24.19 77.114,28.447 77.114,31.423 ; P2.1@30.078,2.75 31.913,0.914 39.514,0.914 41.325,2.725 P1.1 ; C2.2 73.036,72.912 74.371,71.577 84.986,71.577 86.063,72.655 P7.1 87.289,72.655 87.289,72.429 89.103,70.615 89.103,43.078 87.401,41.377 ; C2.2 73.036,73.262 71.342,74.956 71.342,75.196 71.18,75.358 U3.8 U3.7 72.411,76.628 73.681,77.898 ; 77.114,31.423 S3.1 S3.2 87.401,34.31 87.401,41.377
  Bottom Layer w0.3: v1(12.762,44.374) 12.762,25.071 v1(13.139,24.694) 13.139,4.869 v1(16.535,1.473) ; v1(40.361,44.958) 40.361,53.914 40.511,54.064 R12.2
"VCC 5V": R7.2 U4.3 U6.2 | length 108.5
  Top Layer w0.3: U6.2 33.958,22.644 43.396,22.644 v1(43.434,22.682) 70.79,22.682 v1(70.866,22.606) ; v1(73.951,54.599) 74.851,55.499 U4.3
  Bottom Layer w0.3: R7.2 43.256,22.86 v1(43.434,22.682) ; v1(70.866,22.606) 70.866,51.514 v1(73.951,54.599)
pads on no net: S2.4 S2.5 S2.6 S2.10 U1.1 U1.24 U1.28 U2.9 U4.4 U5.4 U5.5 X1.1 X1.8 X1.10
copper on no net:
  other v2: 5.69,17.318 67.14,17.328 67.09,51.628 5.69,51.788
  other v3: 72.925,6.073 18.75,6.298 85,83

## Polygon pours and split planes (outlines as drawn)
GND on Top Layer "GND_L01_P002" (solid, pour order 2): 0,0 90,0 90,88 0,88
GND on Bottom Layer "GND_L02_P003" (solid, pour order 3): 0,0 90,0 90,88 0,88

## Keep-outs
Keep-Out Layer:
  lines w0.3: -0.15,0 ccw(c0,0) 0,-0.15 ; -0.15,0 ccw(c0,0) 0,-0.15 ; -0.15,0 -0.15,88 ; -0.15,88 cw(c0,88) 0,88.15 ; -0.15,88 cw(c0,88) 0,88.15 ; 0,-0.15 90,-0.15 ; 0,88.15 90,88.15 ; 90,-0.15 ccw(c90,0) 90.15,0 ; 90,-0.15 ccw(c90,0) 90.15,0 ; 90,88.15 cw(c90,88) 90.15,88 ; 90,88.15 cw(c90,88) 90.15,88 ; 90.15,0 90.15,88

## Silkscreen, mask and mechanical layers (free items; w line width, h text height)
Top Overlay:
  text "I2C Connector" at 80.948,76.402 h0.8
  text "3.3V" at 79.898,71.998 h0.8
  text "GND" at 80.059,69.453 h0.8
  text "SCL" at 80.059,66.913 h0.8
  text "SDA" at 80.059,64.54 h0.8
  text "BUTTON 1" at 79.573,47.863 h0.8
  text "BUTTON 2" at 79.523,38.688 h0.8
  text "SENSORS" at 84.199,28.864 h0.8
  text "ON" at 86.613,26.631 h0.8
  text "OFF" at 86.263,16.483 h0.8
  text "Vin 21V DC max" at 77.392,12.063 h1
  text "BEETECH" at 70.497,10.45 h0.8
  text "TEMP BEEHIVE" at 23.574,10.425 h0.8
  text "CONNECTOR IN" at 80.847,10.4 h0.8
  text "CONNECTOR  OUT" at 2.571,10.375 h0.8
  text "TEMP SCALE" at 34.821,10.35 h0.8
  text "SCALE SENSOR" at 45.831,10.275 h0.8
  text "SOUND SENSOR" at 59.586,10.3 h0.8
  text "GND" at 84.914,7.314 h0.8 r90
  text "VIN" at 87.225,7.314 h0.8 r90
  text "GND" at 25.625,7.122 h0.8 r90
  text "DATA" at 28.05,7.122 h0.8 r90
  text "VCC" at 30.675,7.122 h0.8 r90
  text "GND" at 36.875,7.047 h0.8 r90
  text "DATA" at 39.23,7.047 h0.8 r90
  text "VCC" at 41.825,7.047 h0.8 r90
  text "RX1" at 4.565,7.022 h0.8 r90
  text "TX1" at 7.115,7.022 h0.8 r90
  text "GND" at 9.74,7.022 h0.8 r90
  text "VIN" at 12.14,7.022 h0.8 r90
  text "GND" at 61.675,6.997 h0.8 r90
  text "DATA" at 64.15,6.997 h0.8 r90
  text "VCC" at 66.7,6.997 h0.8 r90
  text "VCC" at 47.775,6.972 h0.8 r90
  text "SCK" at 50.35,6.972 h0.8 r90
  text "DATA" at 52.775,6.972 h0.8 r90
  text "GND" at 55.5,6.972 h0.8 r90
Bottom Overlay:
  text "3.3V" at 41.226,52.576 h0.7
  text "Vin" at 43.739,52.576 h0.7
  text "BEETECH" at 30.387,50.35 h1.4
  text "MASTER BOARD VERSION 02" at 30.382,48.104 h1

## Text inside footprints (layer, text, board x,y; h text height)
U2: Top Overlay "MISO" at 0.33,24.054 h0.6; Top Overlay "MOSI" at 0.33,31.674 h0.6; Top Overlay "SCK" at 0.33,29.134 h0.6; Top Overlay "LED" at 0.33,26.594 h0.6; Top Overlay "CS" at 0.33,39.294 h0.6; Top Overlay "GND" at 0.33,41.834 h0.6; Top Overlay "VCC" at 0.33,44.374 h0.6; Top Overlay "RST" at 0.33,36.754 h0.6; Top Overlay "DC" at 0.33,34.214 h0.6
U6: Top Overlay "EN" at 29.607,17.094 h0.7; Top Overlay "GND" at 29.207,24.694 h0.7; Top Overlay "5V" at 29.507,22.294 h0.7; Top Overlay "Vin" at 29.207,19.694 h0.7